# EAGLE board mWii (EAGLE 6.5.0)
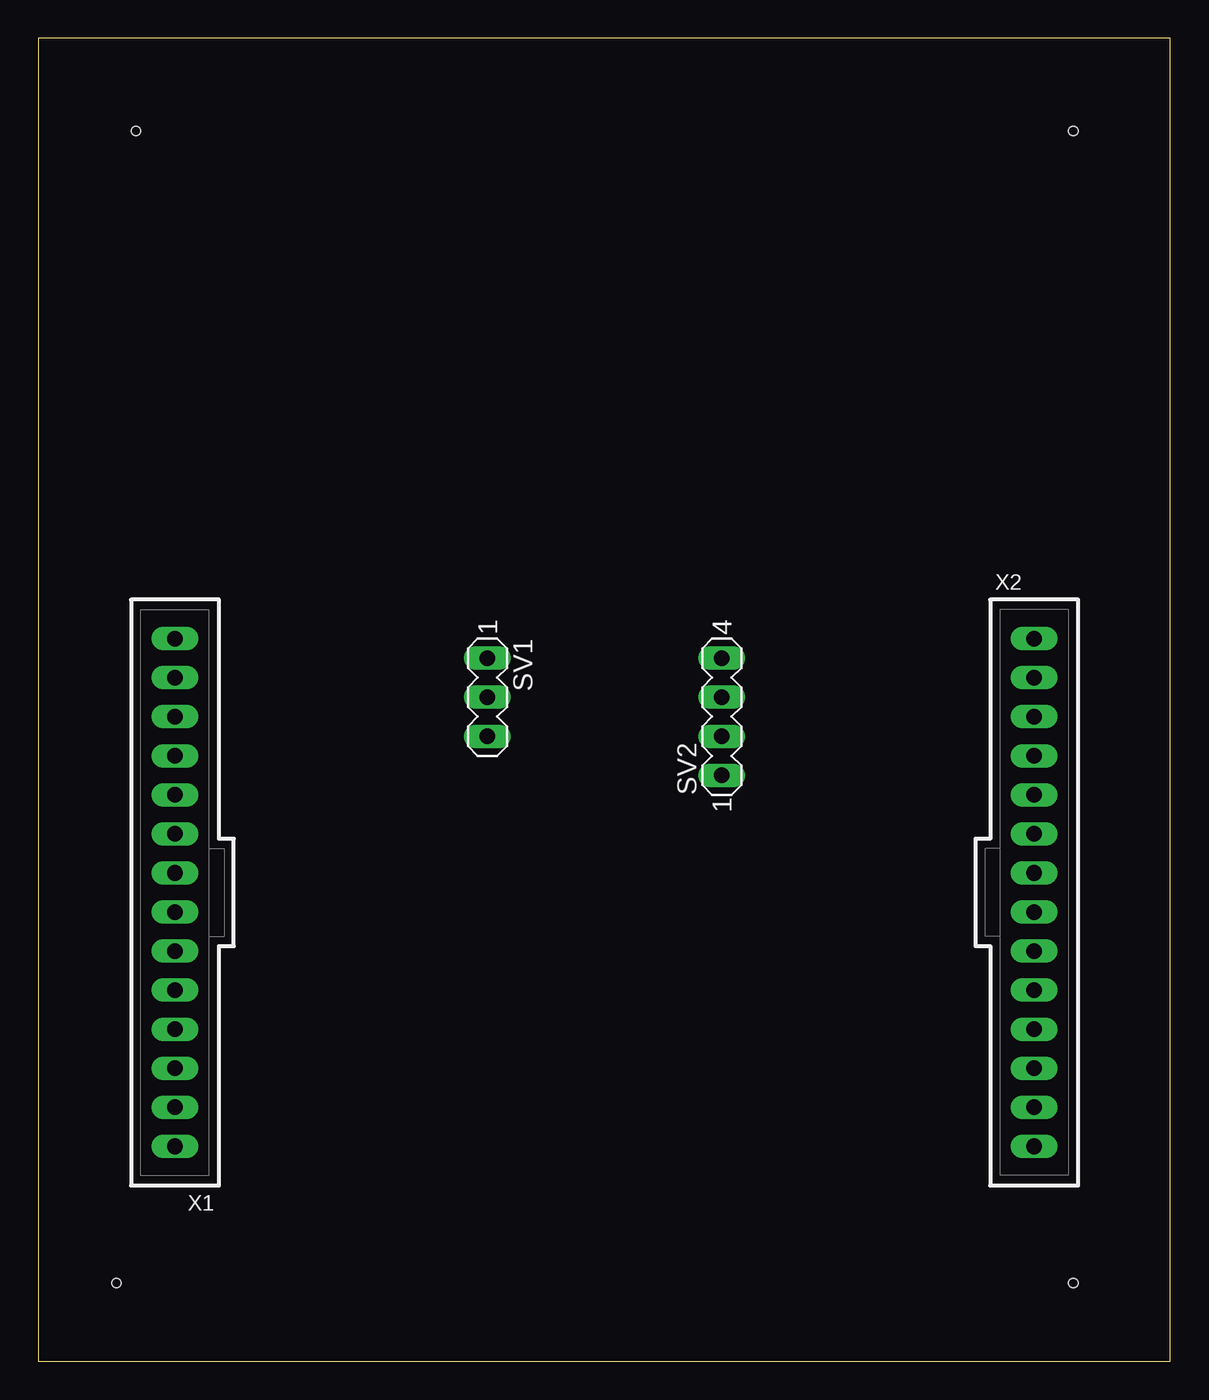
[diagram p0: board, top side]
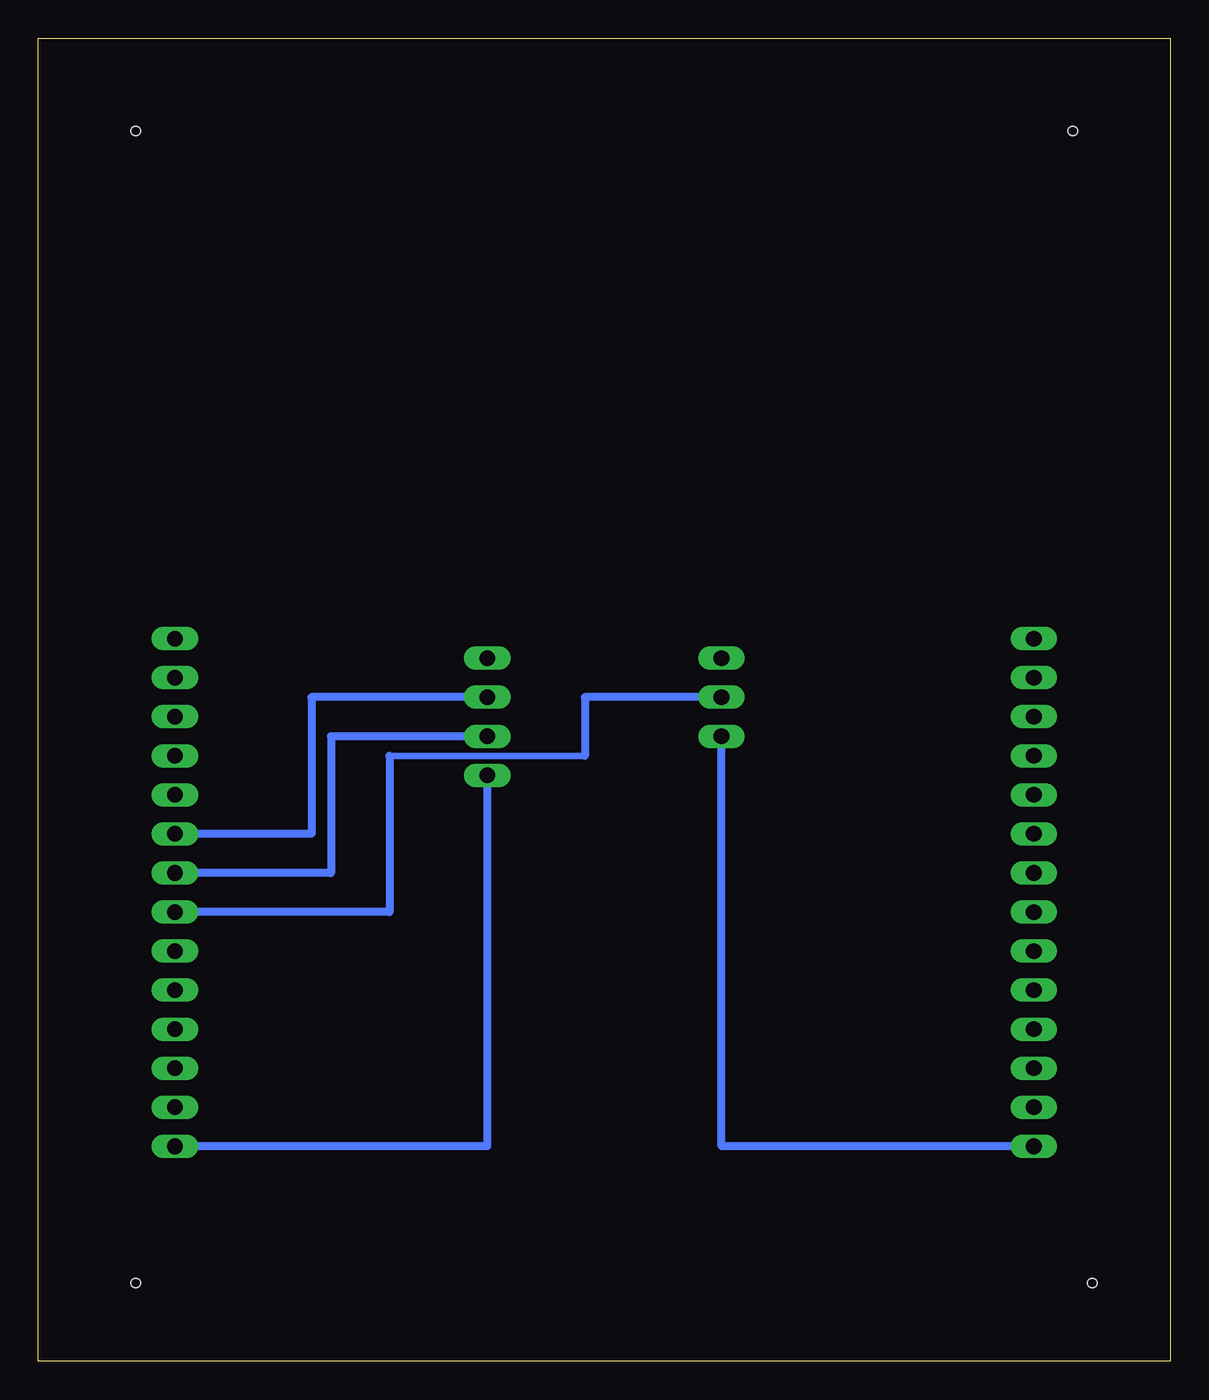
[diagram p1: board, bottom side, seen from below]

Size 73.64 x 86.03 mm. Coordinates in mm from the lower left corner, seen from the top.
Outline: 0,0 73.64,0 73.64,86.03 0,86.03 0,0
Copper layers (1*16): Top 0.035mm / dielectric 1.5mm / Bottom 0.035mm
Design rules "default": minimum track width 10mil, minimum drill 24mil, track to track 8mil, track to pad 8mil, pad to pad 8mil, via to via 8mil, smd to smd 8mil, copper to edge 40mil, drill to drill 8mil, minimum pad ring 10mil, minimum via ring 8mil, stop-mask expansion 4mil, vias tented up to drill 0mil, thermal gap 10mil
Holes 0.6 mm at 5.08,5.08 67.31,5.08 6.35,80.01 67.31,80.01

## Footprints (pad centres in the part's own frame; a part is rotated, then mirrored left to right if it is on the bottom)
MA03-1 = drill 1.016 long: 1 -2.54,0; 2 0,0; 3 2.54,0
MA04-1 = drill 1.016 long: 1 -3.81,0; 2 -1.27,0; 3 1.27,0; 4 3.81,0
70543-14 = drill 1.016 long: 1 -16.51,0; 2 -13.97,0; 3 -11.43,0; 4 -8.89,0; 5 -6.35,0; 6 -3.81,0; 7 -1.27,0; 8 1.27,0; 9 3.81,0; 10 6.35,0; 11 8.89,0; 12 11.43,0; 13 13.97,0; 14 16.51,0

## Placement (x,y rotation side)
SV1  [MA03-1]  29.21,43.18 270 top
SV2  [MA04-1]  44.45,41.91 90 top
X1  C-GRID-14-70543  [70543-14]  8.89,30.48 90 top
X2  C-GRID-14-70543  [70543-14]  64.77,30.48 270 top

## Library data of the parts
SV1 SV2 = con-lstb; OC_FARNELL: unknown; OC_NEWARK: unknown
X1 X2 = con-molex; OC_FARNELL: unknown; OC_NEWARK: unknown

## Nets
N$1: SV2.1 X2.14
N$2: SV1.3 X1.1
N$3: SV1.2 X2.8
N$4: SV2.2 X2.7
N$5: SV2.3 X2.6

## Tracks (layer width: path | path; a pad name or v marks a point on that pad's centre or on a via)
N$1
  Bottom 0.508: SV2.1 44.45,13.97 X2.14
N$2
  Bottom 0.508: X1.1 29.21,13.97 SV1.3
N$3
  Bottom 0.406: 38.1,39.37 50.8,39.37
  Bottom 0.508: SV1.2 38.1,43.18 38.1,39.37 | 50.8,39.37 50.8,29.21 X2.8
N$4
  Bottom 0.508: SV2.2 54.61,40.64 54.61,31.75 X2.7
N$5
  Bottom 0.508: SV2.3 55.88,43.18 55.88,34.29 X2.6